# Altium PCB CAN_Hub.PcbDoc
Units mil, origin at the board's own origin, x right, y up, seen from the top; angles counter-clockwise.
Board outline 1811.02 x 1417.32 mil, 2 copper layers (Top Layer, Bottom Layer); 11 components, 6 nets, 80 pads, 1 vias.
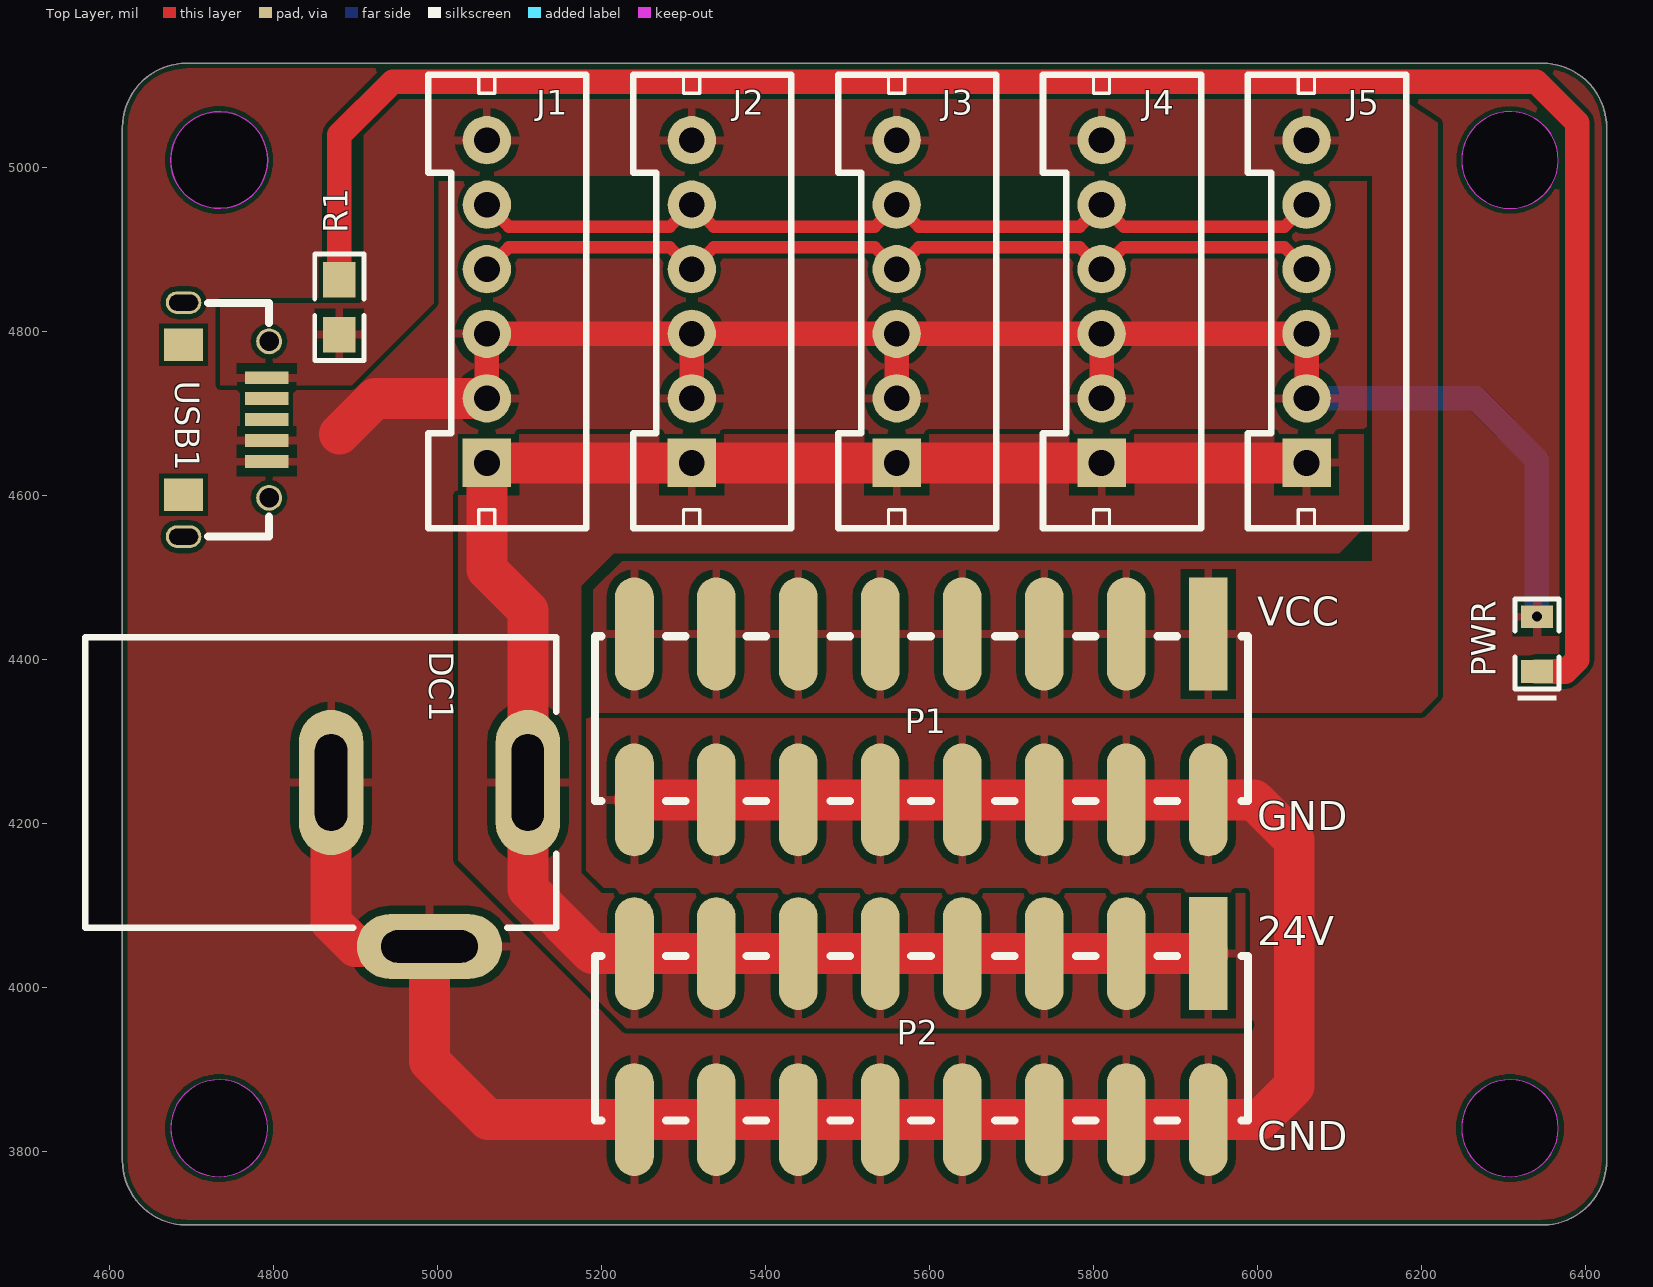
[diagram p0: Top Layer view]
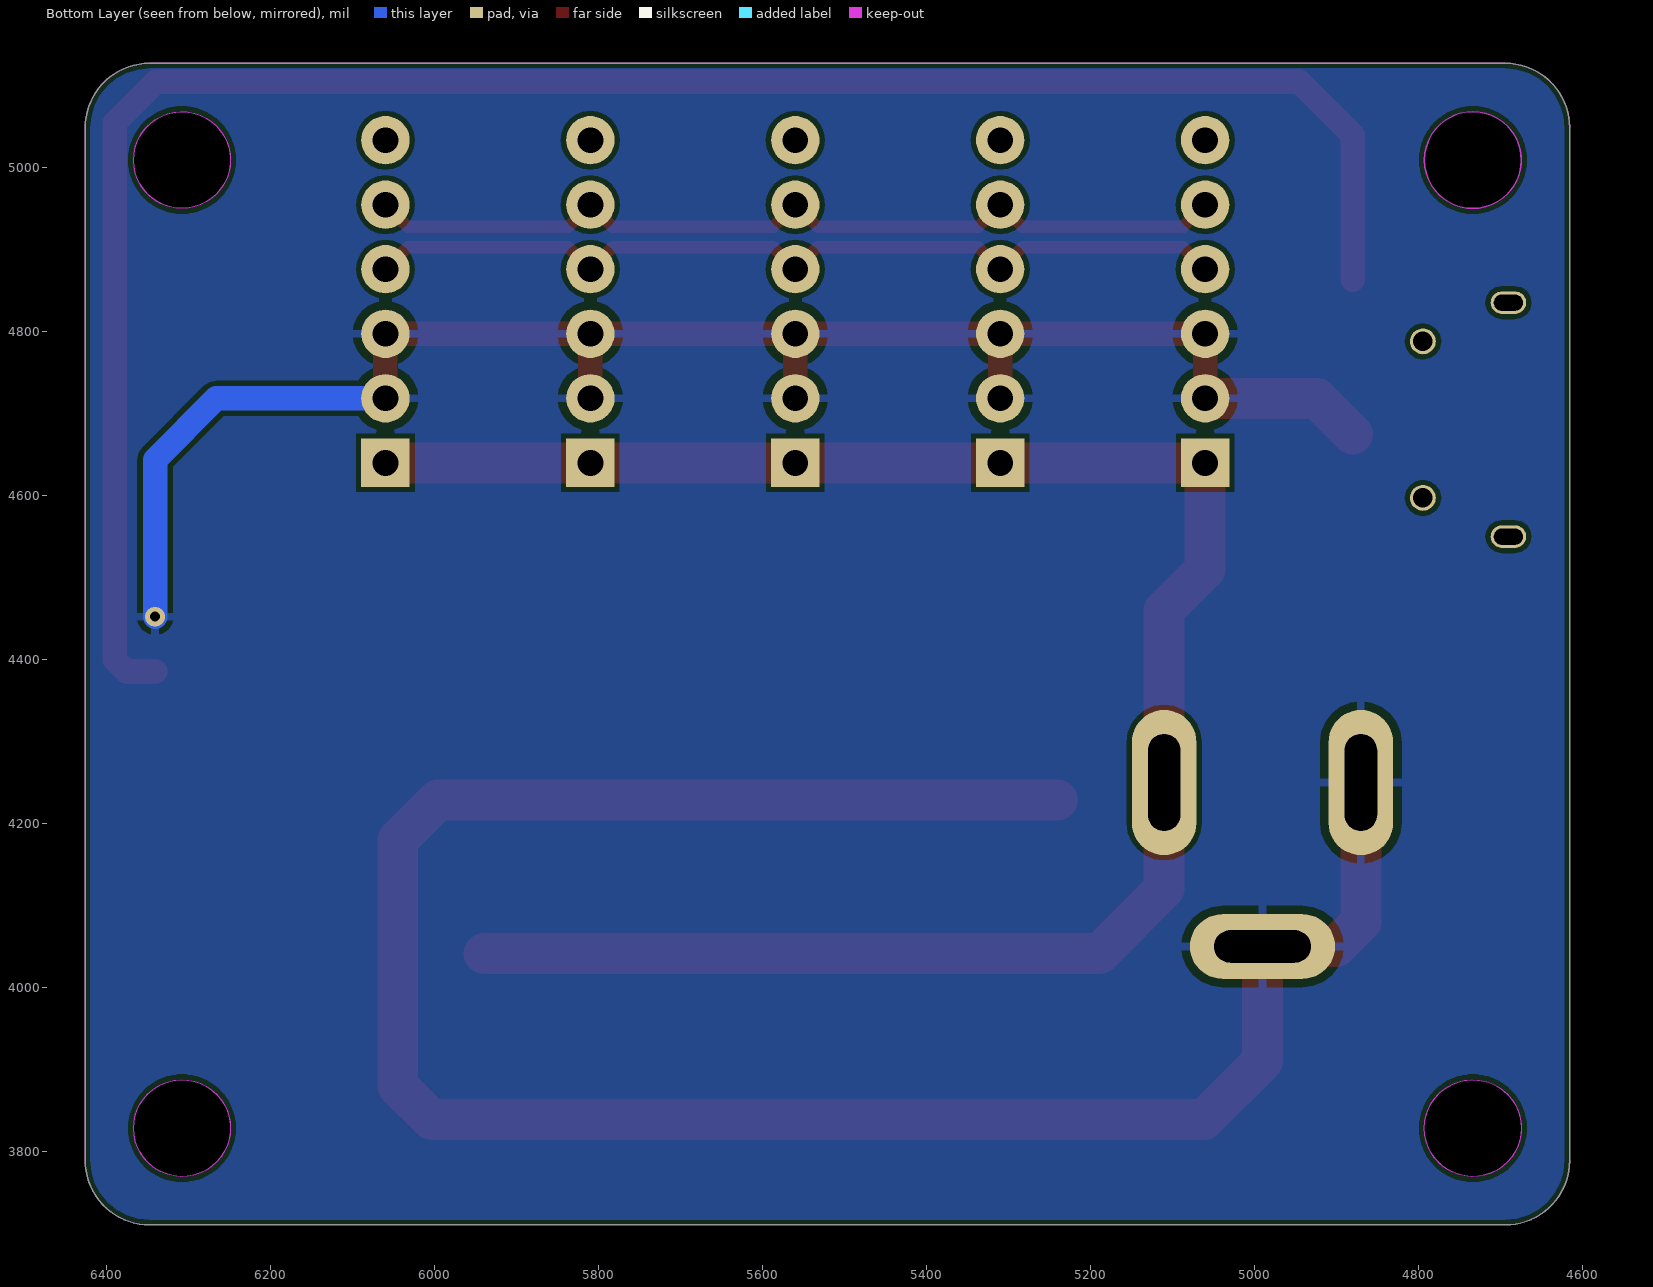
[diagram p1: Bottom Layer view, seen from below]
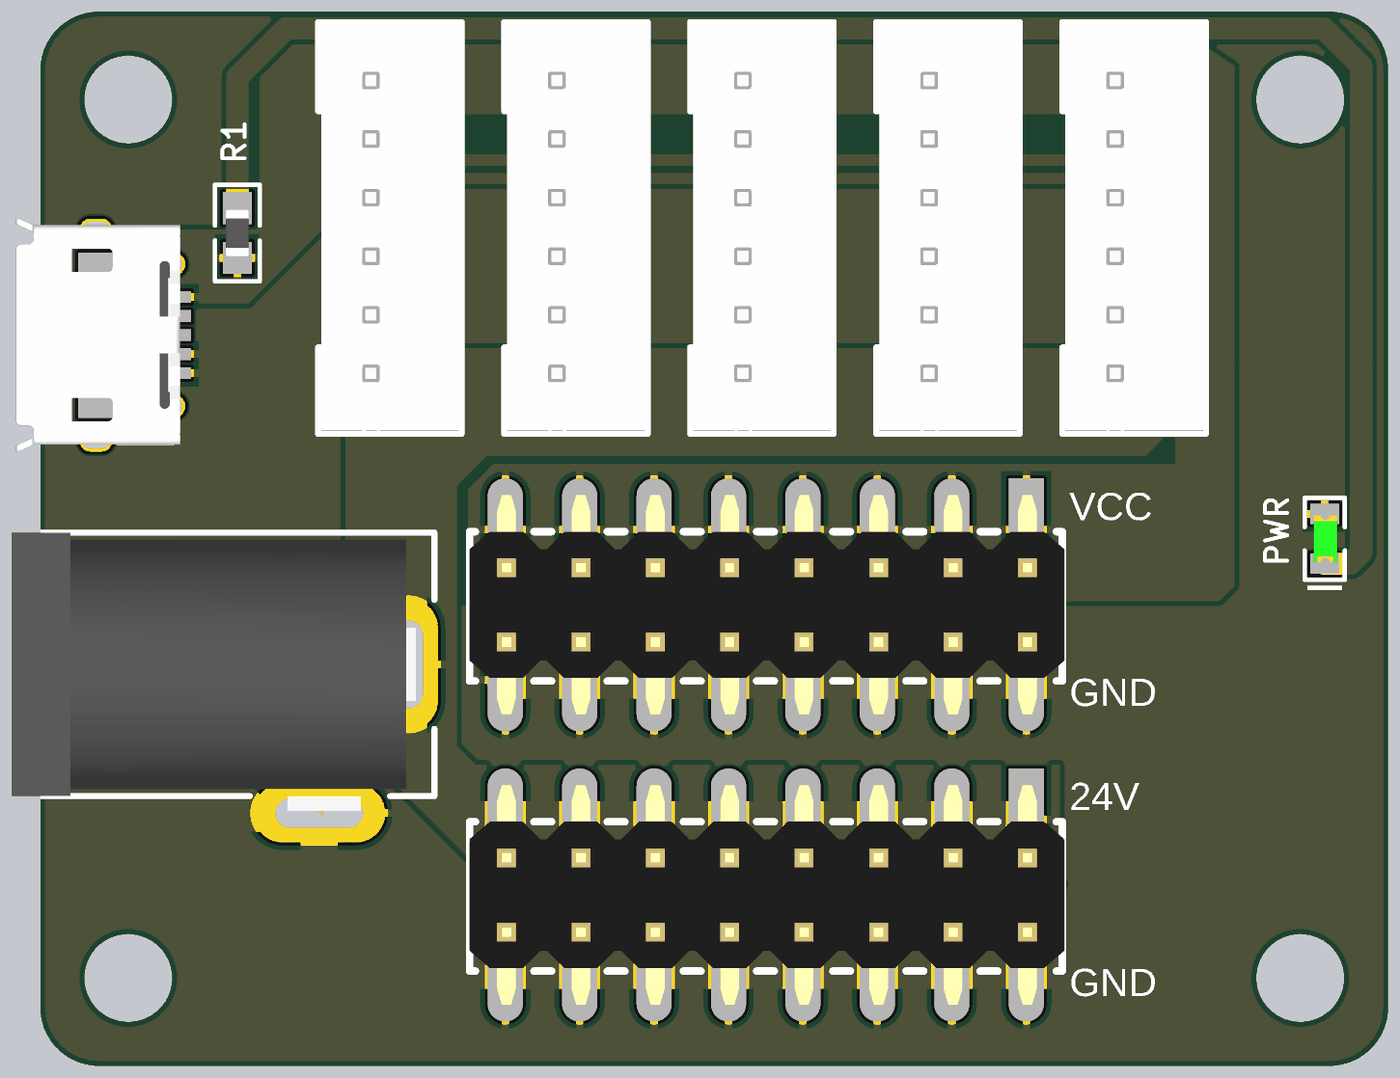
[diagram p2: 3D render of the assembled board from above, using the file's embedded part models]

## Layer stack, top to bottom
Top Solder: solder mask 0.4, Solder Resist, Dk 3.5
Top Layer: signal copper 1.4
Dielectric 1: dielectric 12.6, FR-4, Dk 4.8
Bottom Layer: signal copper 1.4
Bottom Solder: solder mask 0.4, Solder Resist, Dk 3.5

## Board outline
4615.25,3788.99 ccw(c4693.99,3788.99) 4693.99,3710.25 6347.53,3710.25 ccw(c6347.53,3788.99) 6426.27,3788.99 6426.27,5048.83 ccw(c6347.53,5048.83) 6347.53,5127.57 4693.99,5127.57 ccw(c4693.99,5048.83) 4615.25,5048.83
cut-out: 6249.11,3828.36 ccw(c6308.16,3828.36) 6308.16,3769.31 ccw(c6308.16,3828.36) 6367.22,3828.36 ccw(c6308.16,3828.36) 6308.16,3887.42 ccw(c6308.16,3828.36)
cut-out: 4674.31,3828.36 ccw(c4733.36,3828.36) 4733.36,3769.31 ccw(c4733.36,3828.36) 4792.42,3828.36 ccw(c4733.36,3828.36) 4733.36,3887.42 ccw(c4733.36,3828.36)
cut-out: 6249.11,5009.46 ccw(c6308.16,5009.46) 6308.16,4950.41 ccw(c6308.16,5009.46) 6367.22,5009.46 ccw(c6308.16,5009.46) 6308.16,5068.52 ccw(c6308.16,5009.46)
cut-out: 4733.36,4950.41 cw(c4733.36,5009.46) 4674.31,5009.46 cw(c4733.36,5009.46) 4733.36,5068.52 cw(c4733.36,5009.46) 4792.42,5009.46 cw(c4733.36,5009.46)

## Design rules (kind name [scope] priority, off if disabled: settings)
Clearance [All] p1: gap=6
DiffPairsRouting [All] p1: maxlimit=10 minlimit=10 mostfreqgap=10 toplayer_minwidth=15 toplayer_maxwidth=15 toplayer_prefwidth=15 bottomlayer_minwidth=15 bottomlayer_maxwidth=15 bottomlayer_prefwidth=15 maxuncoupledlength=500
PolygonConnect [All] p1: connectstyle=Relief reliefconductorwidth=10 reliefentries=4 polygonreliefangle="90 Angle" airgapwidth=10
RoutingVias [All] p1: holewidth=28 width=50 viastyle="Through Hole" minholewidth=28 minwidth=50 maxholewidth=28 maxwidth=50
SolderMaskExpansion [All] p1: expansion=4
Width [All] p1: maxlimit=100 minlimit=6 preferedwidth=10
29 further rules are at their usual default settings.

## Classes and differential pairs
differential pair CAN: +CAN_P -CAN_N

## Components (designator, comment, footprint, x,y, rotation, side; value= is the part's Value field where it differs from the comment)
DC1 "DC_Socket" DC-005 5150,4250 r0 top
J1 "PH2.0-6P" PH2.0-6P 5060,4640 r90 top
J2 "PH2.0-6P" PH2.0-6P 5310,4640 r90 top
J3 "PH2.0-6P" PH2.0-6P 5560,4640 r90 top
J4 "PH2.0-6P" PH2.0-6P 5810,4640 r90 top
J5 "PH2.0-6P" PH2.0-6P 6060,4640 r90 top
P1 "Header_2X8" Header_SMD_2.54X8 5590,4330 r180 top
P2 "Header_2X8" Header_SMD_2.54X8 5590,3940 r180 top
PWR "LED_BLUE" LED_0603_B 6341.09,4418.91 r90 top
R1 "470R" Res-0603 4880,4830 r90 top
USB1 "USB-MICRO" USB-MICRO-SMD_C 4690,4550 r90 top

## Footprints (in the part's own frame and the unit in brackets; to place one, negate y for a bottom-side part, rotate by r counter-clockwise, add the part's x,y. Pads: shape width x height; smd on the part's side, far side on the other; paste and mask are expansions set on the pad)
DC-005 [mm] "DC电源插座"
  oval 2x4.5 hole 1 slot 3 at 90 deg: 1(-1.016,0) 2(-7.112,0)
  oval 4.5x2 hole 1 slot 3 at 0 deg: 3(-4.064,-5.08)
  silkscreen extent -14.73,-4.5 -0.13,4.5, body extent -14.59,-5.01 -0.76,4.5, height 11.02
Header_SMD_2.54X8 [mm]
  rect 1.2x3.5 smd: 1(-8.89,-2.57)
  oval 1.2x3.5 smd: 2(-6.35,-2.57) 3(-3.81,-2.57) 4(-1.27,-2.57) 5(1.27,-2.57) 6(3.81,-2.57) 7(6.35,-2.57) 8(8.89,-2.57) 9(8.89,2.57) 10(6.35,2.57) 11(3.81,2.57) 12(1.27,2.57) 13(-1.27,2.57) 14(-3.81,2.57) 15(-6.35,2.57) 16(-8.89,2.57)
  silkscreen extent -10.12,-2.5 10.11,2.6, body extent -10.2,-3.75 10.12,3.75, height 9.7
LED_0603_B [mm]
  rect 0.7x1 smd: 1(-0.85,0) 2(0.85,0)
  silkscreen extent -1.75,-0.69 1.4,0.69, body extent -0.8,-0.42 0.8,0.38, height 0.61
PH2.0-6P [mm]
  rect 1.5x1.5 hole 0.8: 1(0,0)
  round 1.5 hole 0.8: 2(2,0) 3(4,0) 4(6,0) 5(8,0) 6(10,0)
  silkscreen extent -2.03,-3.08 12.03,1.82, body extent -1.91,-2.98 11.99,1.71, height 6.01
Res-0603 [mm]
  rect 1.1x1 smd: 1(-0.85,0) 2(0.85,0)
  silkscreen extent -1.65,-0.76 1.65,0.76, body extent -0.8,-0.4 0.8,0.4, height 0.38
USB-MICRO-SMD_C [mm]
  oval 0.7x1.1 hole 0.5 slot 0.9 at 90 deg: 0(0,0) 0(7.25,0)
  round 0.8 hole 0.6: 0(1.2,-2.65) 0(6.05,-2.65)
  rect 1x1.2 smd: 0(1.3,0) 0(5.95,0)
  rect 0.4x1.35 smd: 1(4.925,-2.575) 2(4.275,-2.575) 3(3.625,-2.575) 4(2.975,-2.575) 5(2.325,-2.575)
  silkscreen extent 0,-2.65 7.24,-0.76, body extent -0.37,-2.87 7.63,2.73, height 2.8

## Part data
DC1: "DC电源座"
PWR: library part LED_SMD_BLUE, "发光二极管"
R1: library part RES, "贴片电阻"

## Via types
v1: diameter 24, hole 12, Top Layer to Bottom Layer, 1 vias

## Nets (pads, with @x,y where several pads share a name; then routed paths per layer and width w, separated by ;. In a path a pad name is that pad's centre, name@x,y a point inside that pad or via, vN(x,y) a via of type N, cw(c..) or ccw(c..) an arc to the next point about the centre after c; other vN are vias at no path point)
24V: DC1.1 J1.1 J2.1 J3.1 J4.1 J5.1 P2.1 P2.2 P2.3 P2.4 P2.5 P2.6 P2.7 P2.8 | length 2403.4
  Top Layer w50: P2.1 P2.2 P2.3 P2.4 P2.5 P2.6 P2.7 P2.8 5188.82,4041.18 5110,4120 DC1.1 5110,4460 5060,4510 J1.1 J2.1 J3.1 J4.1 J5.1
CAN_N: J1.4 J2.4 J3.4 J4.4 J5.4 | length 1089
  Top Layer w15: J1.4 5086.87,4903.09 5283.13,4903.09 J2.4 5336.87,4903.09 5533.13,4903.09 J3.4 5586.87,4903.09 5783.13,4903.09 J4.4 5836.87,4903.09 6033.13,4903.09 J5.4
CAN_P: J1.5 J2.5 J3.5 J4.5 J5.5 | length 1089
  Top Layer w15: J1.5 5086.87,4928.09 5283.13,4928.09 J2.5 5336.87,4928.09 5533.13,4928.09 J3.5 5586.87,4928.09 5783.13,4928.09 J4.5 5836.87,4928.09 6033.13,4928.09 J5.5
GND: DC1.2 DC1.3 J1.2 J1.3 J2.2 J2.3 J3.2 J3.3 J4.2 J4.3 J5.2 J5.3 P1.9 P1.10 P1.11 P1.12 P1.13 P1.14 P1.15 P1.16 P2.9 P2.10 P2.11 P2.12 P2.13 P2.14 P2.15 P2.16 PWR.2 USB1.4 USB1.5 | length 4778.8
  Top Layer w30: J1.2 J1.3 J2.3 ; J2.2 J2.3 ; J3.2 J3.3 ; J4.2 J4.3 ; J5.2 J5.3 J4.3 ; J2.3 J3.3 ; J3.3 J4.3
  Top Layer w50: DC1.2@4880,4260 DC1.2 4870,4080 4900,4050 DC1.3 4990,3910 5061.18,3838.82 P2.9 P2.10 P2.11 P2.12 P2.13 P2.14 P2.15 P2.16 6003.82,3838.82 6045,3880 6045,4180 5996.18,4228.82 P1.16 P1.15 P1.14 P1.13 P1.12 P1.11 P1.10 P1.9 ; 4880,4675 4923.74,4718.74 J1.2
  Bottom Layer w30: J5.2 6266.26,4718.74 6341.08,4643.92 v1(6341.08,4452.38)
NetPWR_1: PWR.1 R1.2 | length 2444.1
  Top Layer w30: R1.2 4880,5040 4945,5105 6340,5105 6390,5055 6390,4400 6375.45,4385.45 PWR.1
VCC: J1.6 J2.6 J3.6 J4.6 J5.6 P1.1 P1.2 P1.3 P1.4 P1.5 P1.6 P1.7 P1.8 R1.1 USB1.1
pads on no net: USB1.0 USB1.2 USB1.3

## Polygon pours and split planes (outlines as drawn)
GND on Top Layer "Top Layer-No Net" (solid, remove dead copper, pour order 16): 4465,5325 4515,5275 4515,3620 6595,3620 6655,3560 6550,3665 6550,5275
VCC on Top Layer "Top Layer-No Net" (solid, remove dead copper, pour order 14): 5225,4520 5190,4485 5190,4335 6200,4335 6220,4355 6220,5055 6176.41,5083.59 6175,4995 6140,4995 6140,4520
VCC on Top Layer "Top Layer-No Net" (solid, pour order 12): 4735,4835 4735,4735 4875,4735 4895,4735 4945,4785 4995,4835 4995,4855 4995,4990 6170,4990 6190,5010 6190,5070 6175,5085 5655,5085 4955,5085 4910,5040 4910,4840 4905,4835
24V on Top Layer "Top Layer-No Net" (solid, remove dead copper, pour order 0): 5025,4675 5025,4155 5185,3995 5230,3950 5300,3950 5995,3950 5985,3960 5985,4115 5200,4115 5180,4135 5175,4140 5175,4305 5175,4490 5215,4530 6100,4530 6130,4560 6130,4675
GND on Bottom Layer "Top Layer-No Net" (solid, remove dead copper, pour order 18): 4485,5265 4485,3630 4510,3605 4585,3530 6695,3530 6695,5165 6730,5200

## Keep-outs
Keep-Out Layer:
  circle w0.5: c6308.16,3828.36 r59.06
  circle w0.5: c4733.36,3828.36 r59.06
  circle w0.5: c6308.16,5009.46 r59.06
  circle w0.5: c4733.36,5009.46 r59.06
  lines w0.5: 4615.25,3788.99 ccw(c4693.99,3788.99) 4693.99,3710.25 6347.53,3710.25 ccw(c6347.53,3788.99) 6426.27,3788.99 6426.27,5048.83 ccw(c6347.53,5048.83) 6347.53,5127.57 4693.99,5127.57 ccw(c4693.99,5048.83) 4615.25,5048.83 4615.25,3788.99

## Silkscreen, mask and mechanical layers (free items; w line width, h text height)
Top Overlay:
  text "VCC" at 6000,4430 h60
  text "GND" at 6000,4180 h60
  text "24V" at 6000,4040 h60
  text "GND" at 6000,3790 h60